# Altium PCB HS0038_BOARD.PcbDoc
Units mm, origin at the board's own origin, x right, y up, seen from the top; angles counter-clockwise.
Board outline 85 x 85 mm, 2 copper layers (Top Layer, Bottom Layer); 76 components, 56 nets, 278 pads, 68 vias.
Unrouted connection lines stored in the file: 4.
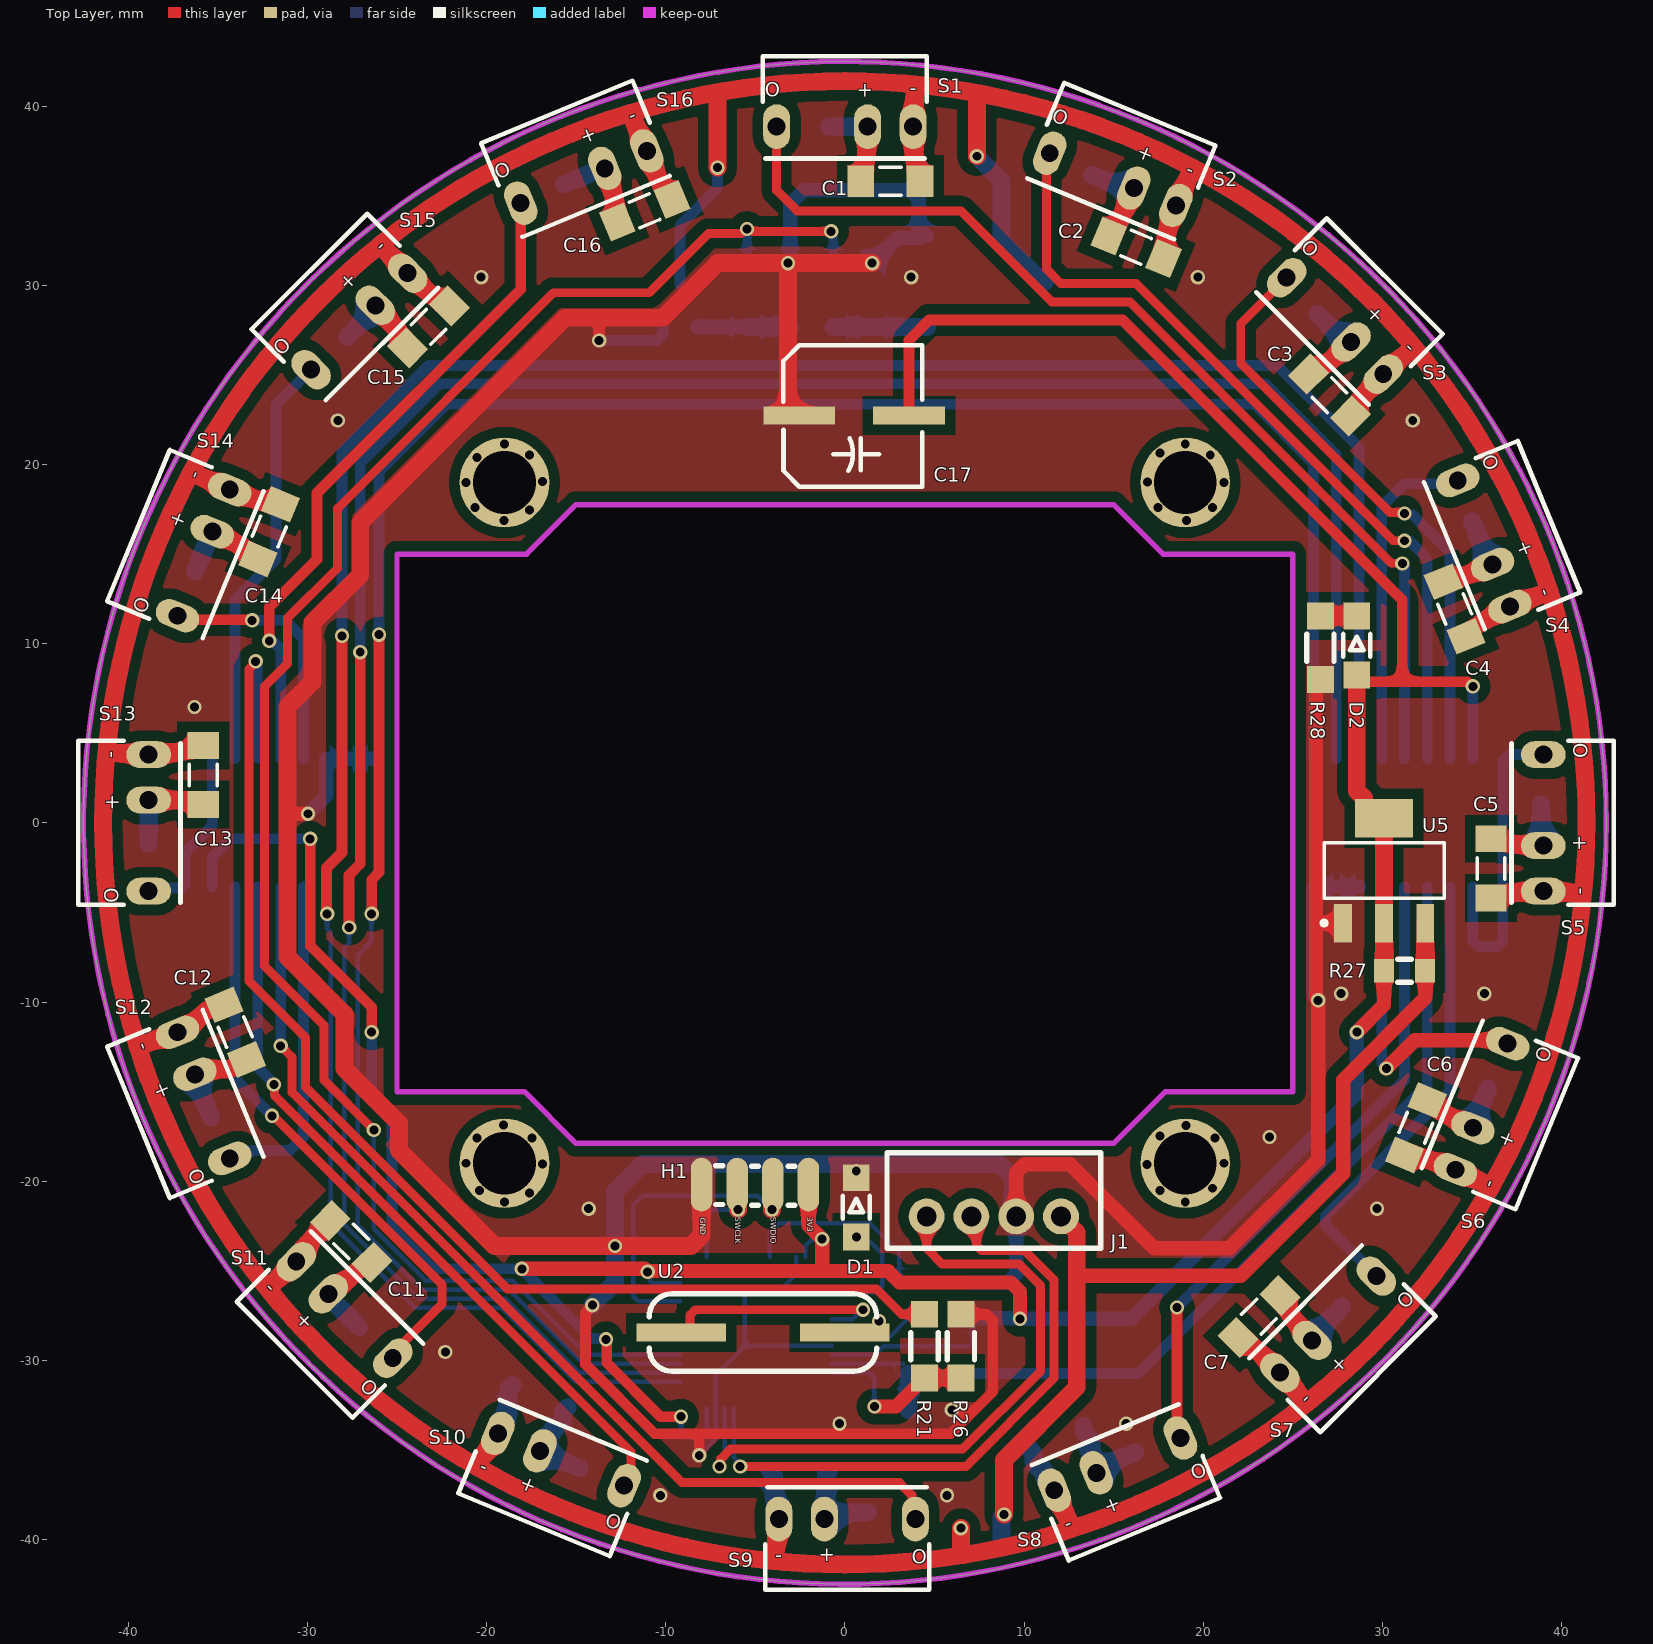
[diagram p0: Top Layer view]
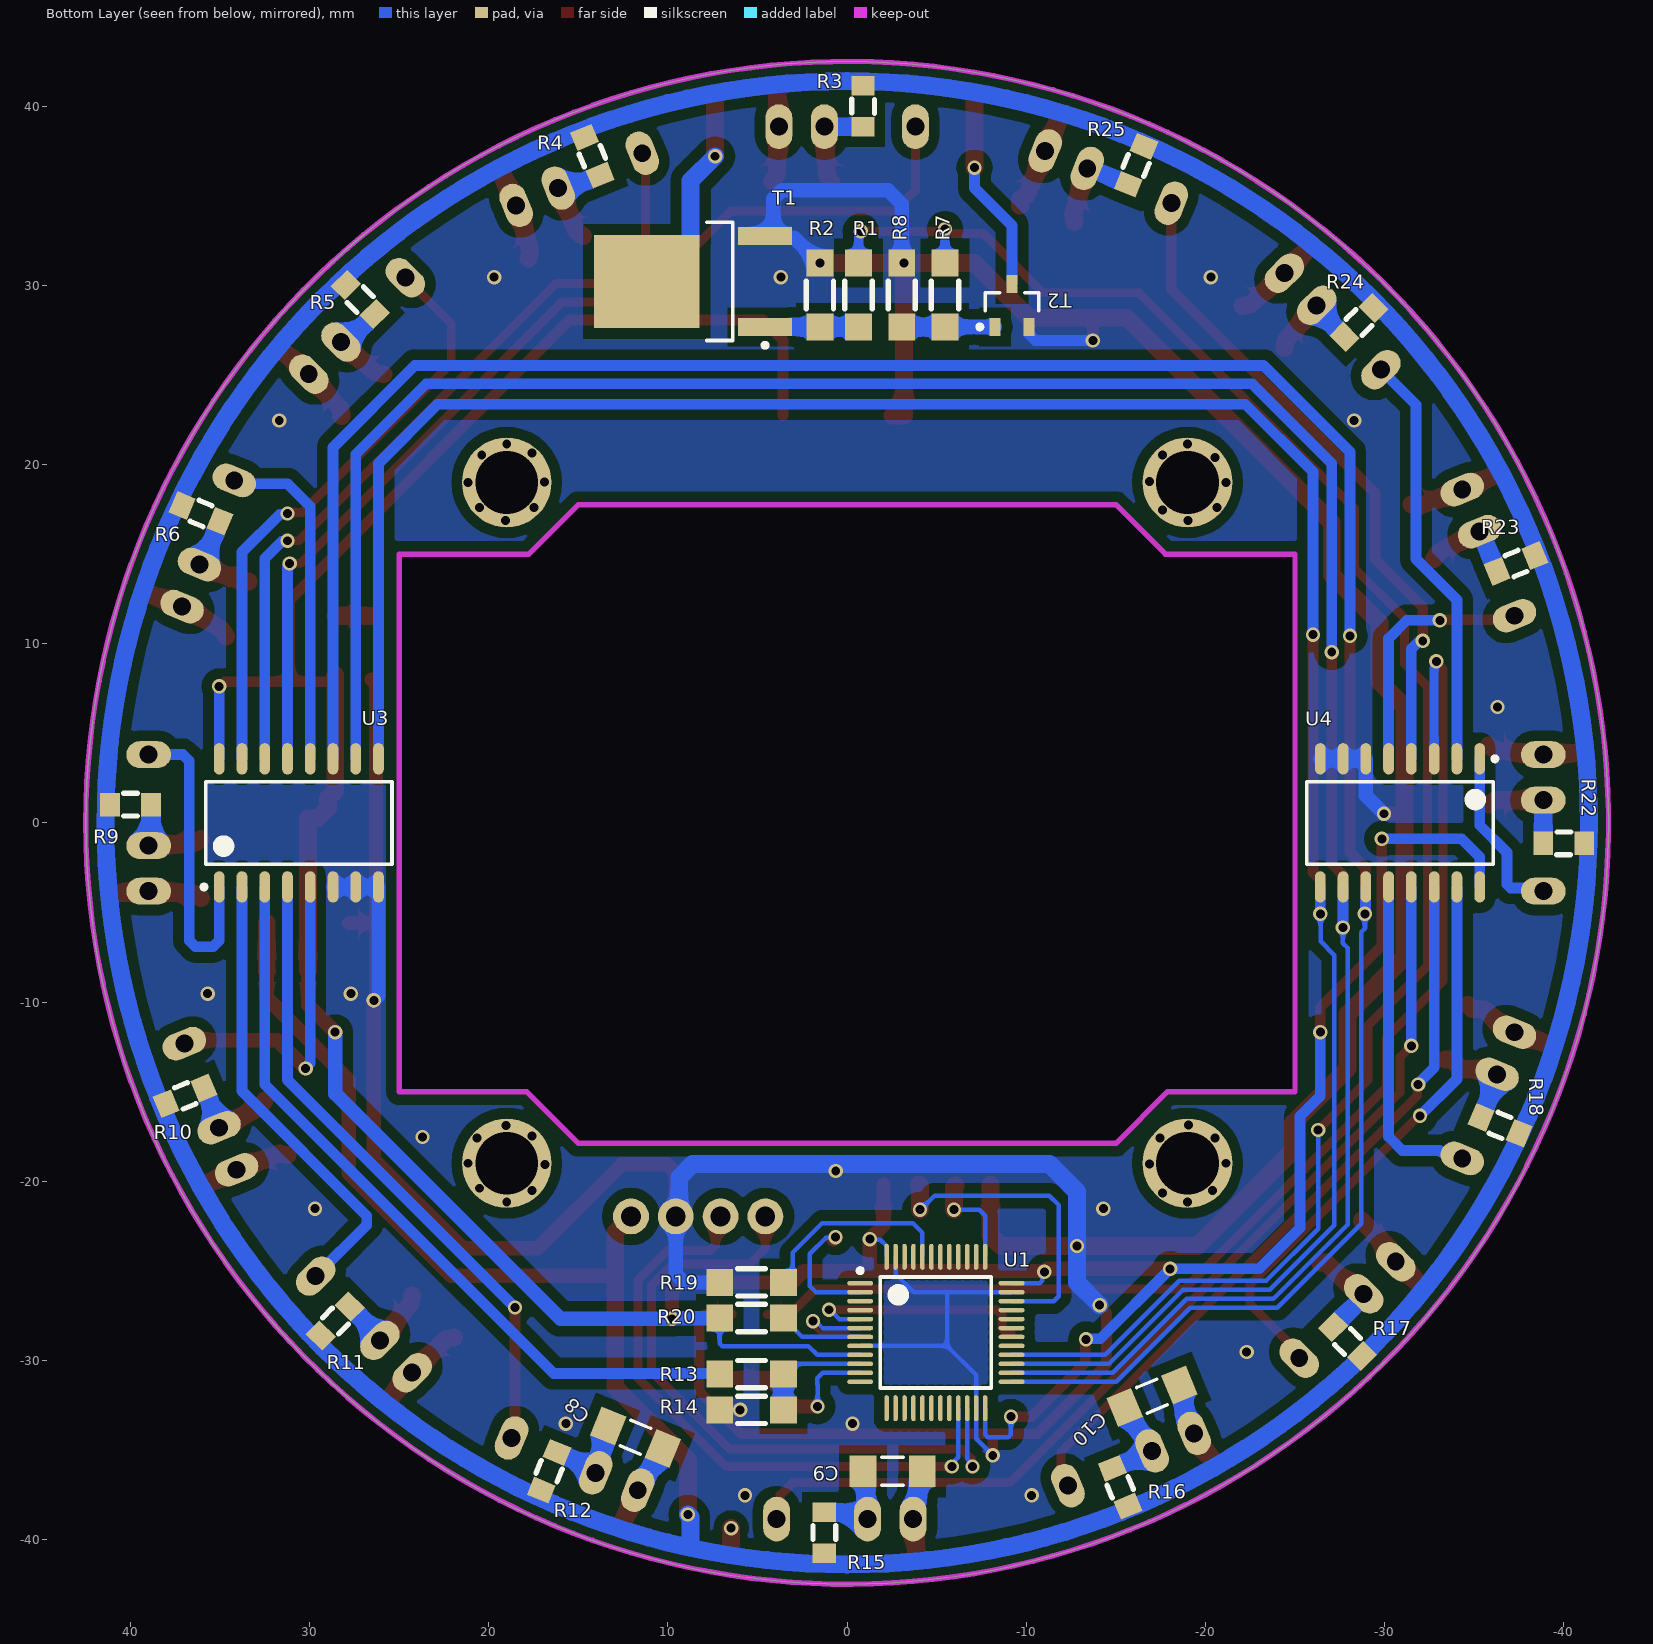
[diagram p1: Bottom Layer view, seen from below]
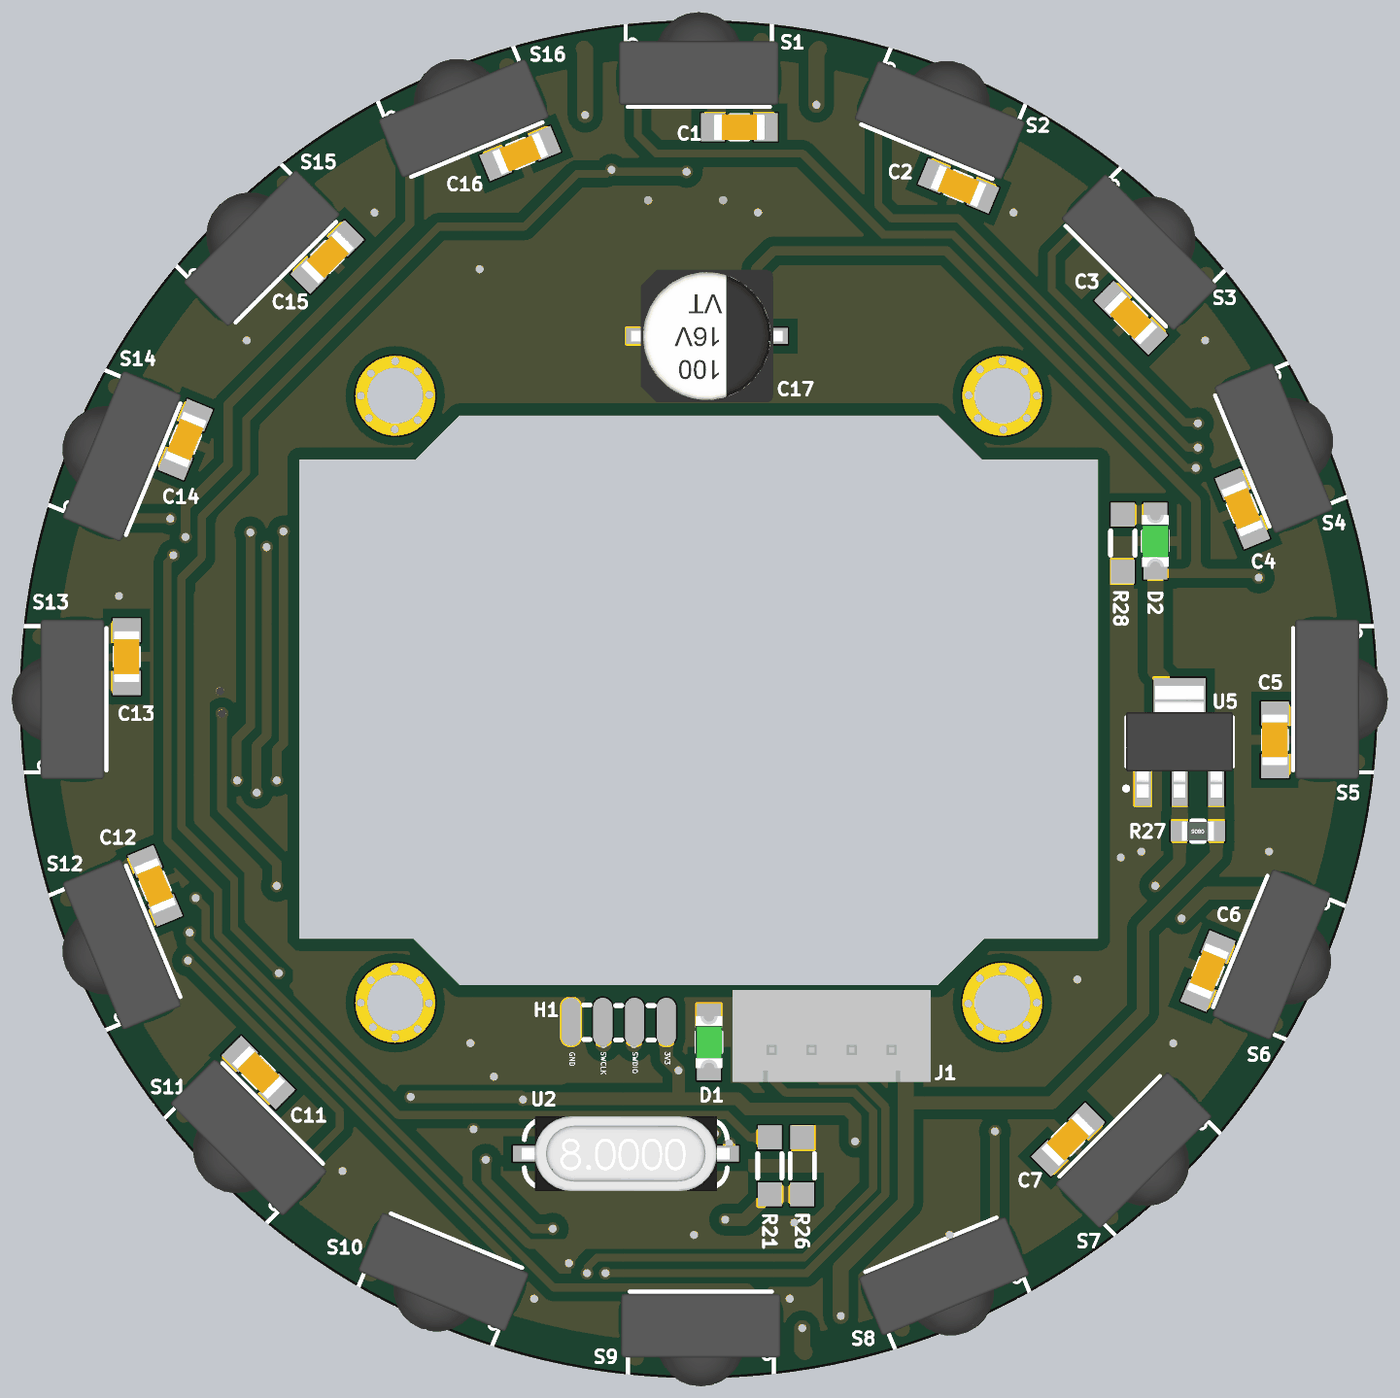
[diagram p2: 3D render of the assembled board from above, using the file's embedded part models]
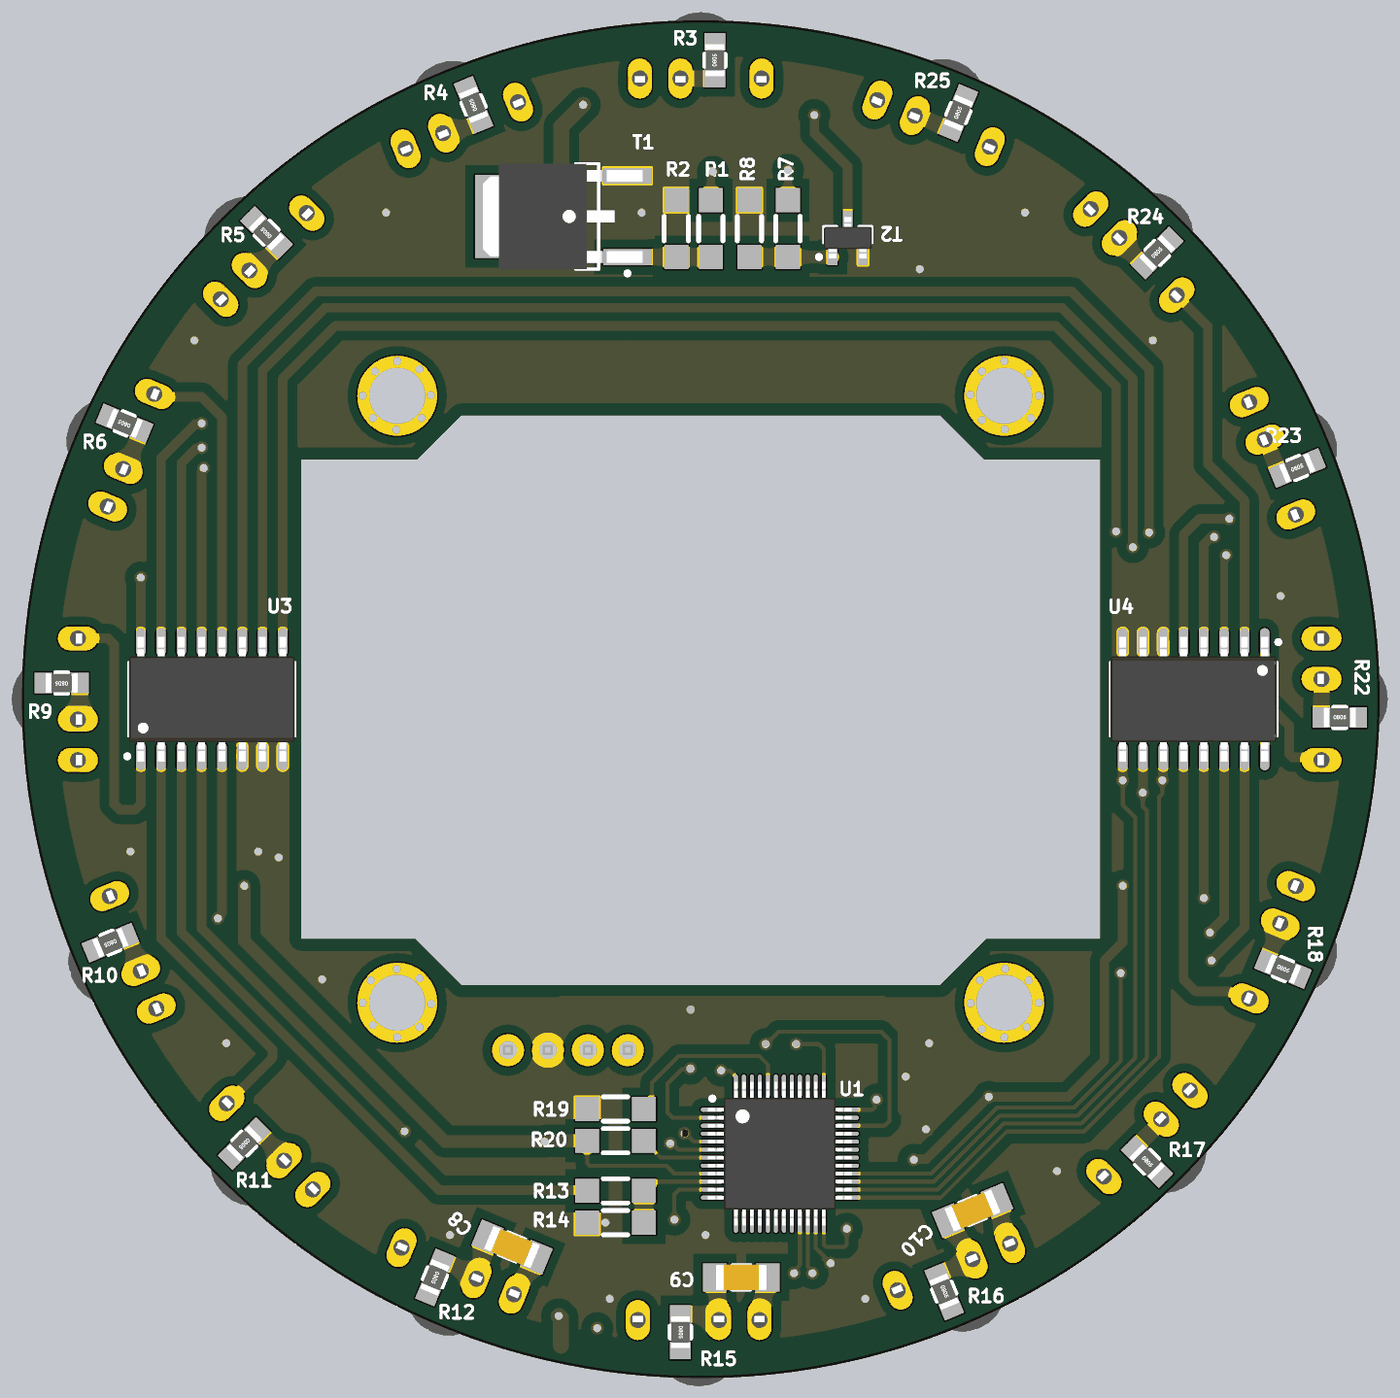
[diagram p3: 3D render of the assembled board from below, using the file's embedded part models]

## Layer stack, top to bottom
Top Solder: solder mask 0.0102, Solder Resist, Dk 3.5
Top Layer: signal copper 0.0356
Dielectric 1: dielectric 0.32, FR-4, Dk 4.8
Bottom Layer: signal copper 0.0356
Bottom Solder: solder mask 0.0102, Solder Resist, Dk 3.5

## Board outline
-42.5,0 ccw(c0,0) 0,-42.5 ccw(c0,0) 42.5,0 ccw(c0,0) 0,42.5 ccw(c0,0)
cut-out: -25,-15 -25,15 -17.766,15 -15,17.766 15,17.766 17.766,15 25,15 25,-15 17.893,-15 15,-17.893 -15,-17.893 -17.893,-15

## Design rules (kind name [scope] priority, off if disabled: settings)
Clearance [All] p1: gap=0.6 ignorepadtopadclearanceinfootprint=FALSE except(0: Arc-Hole Track-Hole SMDPad-Hole THPad-Hole Via-Hole Fill-Hole Poly-Hole Region-Hole Text-Hole; 0.25: Arc-Arc Arc-Track Arc-SMDPad Arc-Via Track-Track Track-SMDPad Track-Via SMDPad-SMDPad SMDPad-Via THPad-Via Via-Via; 0.254: Arc-THPad Arc-Text Track-THPad Track-Text SMDPad-THPad SMDPad-Text THPad-THPad THPad-Text Via-Text Fill-Text Poly-Text Region-Text Text-Text)
PlaneConnect [All] p1: planeconnectstyle=Direct reliefexpansion=0.508 reliefentries=4 reliefconductorwidth=0.254 reliefairgap=0.254
PolygonConnect [All] p1: connectstyle=Direct reliefconductorwidth=0.254 reliefentries=4 polygonreliefangle="90 Angle" airgapwidth=0.254
RoutingVias [All] p1: holewidth=0.5 width=0.8 viastyle="Through Hole" minholewidth=0.5 minwidth=0.8 maxholewidth=0.6 maxwidth=1
SolderMaskExpansion [All] p1: expansion=0.102 istentingtop=FALSE
Width [All] p1: maxlimit=10 minlimit=0.25 preferedwidth=0.3
29 further rules are at their usual default settings.

## Classes and differential pairs
component class HS0038_BOARD: C1 C2 C3 C4 C5 C6 C7 C8 C9 C10 C11 C12 C13 C14 C15 C16 C17 D1 D2 H1 J1 R1 R2 R3 R4 R5 R6 R7 R8 R9 R10 R11 R12 R13 R14 R15 R16 R17 R18 R19 R20 R21 R22 R23 R24 R25 R26 R27 R28 S1 S2 S3 S4 S5 S6 S7 S8 S9 S10 S11 S12 S13 S14 S15 S16 T1 T2 U1 U2 U3 U4 U5

## Components (designator, comment, footprint, x,y, rotation, side; value= is the part's Value field where it differs from the comment)
C1 "CAP" CAP1206 2.54,35.814 r0 top
C2 "CAP" CAP1206 16.257,32.134 r337.5 top
C3 "CAP" CAP1206 27.051,23.876 r315 top
C4 "CAP" CAP1206 34.036,11.938 r292.5 top
C5 "CAP" CAP1206 36.068,-2.54 r270 top
C6 "CAP" CAP1206 31.877,-17.018 r247.5 top
C7 "CAP" CAP1206 23.114,-27.559 r225 top
C8 "CAP" CAP1206 11.811,-34.29 r202.5 bottom
C9 "CAP" CAP1206 -2.54,-36.195 r180 bottom
C10 "CAP" CAP1206 -17.018,-32.004 r157.5 bottom
C11 "CAP" CAP1206 -27.559,-23.368 r135 top
C12 "CAP" CAP1206 -34.033,-11.683 r112.5 top
C13 "CAP" CAP1206 -35.814,2.667 r90 top
C14 "CAP" CAP1206 -32.131,16.256 r67.5 top
C15 "CAP" CAP1206 -23.241,27.686 r45 top
C16 "CAP" CAP1206 -11.177,34.166 r22.5 top
C17 "CAP" "CAP SMD 100uF 16V" 0.508,22.733 r0 top
D1 "LED" "LED GREEN 1206" 0.635,-21.463 r90 top
D2 "LED" "LED GREEN 1206" 28.575,9.906 r90 top
H1 "PROG" PROGRAMER -5.08,-20.193 r180 top
J1 "XH4" "XH 4PIN" 8.318,-21.082 r0 top
R1 "RES" RES1206 -0.635,29.464 r90 bottom
R2 "RES" RES1206 1.524,29.464 r90 bottom
R3 "RES" RES805 -0.889,40.005 r90 bottom
R4 "RES" RES805 14.224,37.211 r67.5 bottom
R5 "RES" RES805 27.178,29.21 r45 bottom
R6 "RES" RES805 36.068,17.272 r22.5 bottom
R7 "RES" RES1206 -5.461,29.464 r90 bottom
R8 "RES" RES1206 -3.048,29.464 r90 bottom
R9 "RES" RES805 40.005,1.016 r0 bottom
R10 "RES" RES805 36.957,-15.24 r337.5 bottom
R11 "RES" RES805 28.575,-27.813 r315 bottom
R12 "RES" RES805 16.637,-36.195 r292.5 bottom
R13 "RES" RES1206 5.334,-30.774 r0 bottom
R14 "RES" RES1206 5.334,-32.766 r180 bottom
R15 "RES" RES805 1.27,-39.624 r270 bottom
R16 "RES" RES805 -15.24,-37.084 r247.5 bottom
R17 "RES" RES805 -27.94,-28.956 r225 bottom
R18 "RES" RES805 -36.449,-16.891 r202.5 bottom
R19 "RES" RES1206 5.334,-25.654 r180 bottom
R20 "RES" RES1206 5.334,-27.644 r180 bottom
R21 "RES" RES1206 4.445,-29.21 r90 top
R22 "RES" RES805 -40.005,-1.143 r180 bottom
R23 "RES" RES805 -37.338,14.478 r157.5 bottom
R24 "RES" RES805 -28.575,27.94 r135 bottom
R25 "RES" RES805 -16.129,36.703 r112.5 bottom
R26 "RES" RES1206 6.477,-29.21 r270 top
R27 "RES" RES805 31.242,-8.255 r180 top
R28 "RES" RES1206 26.543,9.779 r270 top
S1 "TSOP1738" TSOP1738 0,38.608 r180 top
S2 "TSOP1738" TSOP1738 14.859,35.687 r157.5 top
S3 "TSOP1738" TSOP1738 27.178,27.559 r135 top
S4 "TSOP1738" TSOP1738 35.433,15.494 r112.5 top
S5 "TSOP1738" TSOP1738 38.735,0 r90 top
S6 "TSOP1738" TSOP1738 35.306,-15.748 r67.5 top
S7 "TSOP1738" TSOP1738 26.797,-27.813 r45 top
S8 "TSOP1738" TSOP1738 15.113,-35.56 r22.5 top
S9 "TSOP1738" TSOP1738 0.127,-38.608 r0 top
S10 "TSOP1738" TSOP1738 -15.748,-35.306 r337.5 top
S11 "TSOP1738" TSOP1738 -27.751,-27.007 r315 top
S12 "TSOP1738" TSOP1738 -35.56,-15.113 r292.5 top
S13 "TSOP1738" TSOP1738 -38.608,0 r270 top
S14 "TSOP1738" TSOP1738 -35.56,14.986 r247.5 top
S15 "TSOP1738" TSOP1738 -26.924,27.813 r225 top
S16 "TSOP1738" TSOP1738 -14.478,35.814 r202.5 top
T1 "FDD" FDD6690A 8.636,30.226 r0 bottom
T2 "AO3400A" AO3400A -9.205,28.886 r90 bottom
U1 "STM32F103C8T6" STM32F103C8T6 -4.953,-28.448 r180 bottom
U2 "Oscilator" "Crystal Oscilator" -4.572,-28.448 r0 top
U3 "MUX8" "4051 SMD" 30.607,0 r90 bottom
U4 "MUX8" "4051 SMD" -30.861,0 r270 bottom
U5 "1117" AMS1117 30.099,-2.667 r90 top
? "Comment" SCREW -19,-19 r90 top
? "Comment" SCREW 19,-19 r180 top
? "Comment" SCREW 19,19 r270 top
? "Comment" SCREW -19,19 r0 top

## Footprints (in the part's own frame and the unit in brackets; to place one, negate y for a bottom-side part, rotate by r counter-clockwise, add the part's x,y. Pads: shape width x height; smd on the part's side, far side on the other; paste and mask are expansions set on the pad)
"4051 SMD" [mm] "SOP, 16-Leads, Body 10.20x5.30mm, Pitch 1.27mm, IPC Medium Density"
  oval 1.75x0.6 smd: 1(-3.575,4.445) 2(-3.575,3.175) 3(-3.575,1.905) 4(-3.575,0.635) 5(-3.575,-0.635) 6(-3.575,-1.905) 7(-3.575,-3.175) 8(-3.575,-4.445) 9(3.575,-4.445) 10(3.575,-3.175) 11(3.575,-1.905) 12(3.575,-0.635) 13(3.575,0.635) 14(3.575,1.905) 15(3.575,3.175) 16(3.575,4.445)
  silkscreen extent -3.7,-5.2 2.3,5.42, body extent -3.9,-5.2 3.9,5.2, height 2
AMS1117 [mm] "SOT223, 4-Leads, Body 6.30x7.00mm (avg), Pitch 2.30mm, IPC Medium Density"
  rect 2.15x1 smd: 1(-2.925,2.3) 2(-2.925,0) 3(-2.925,-2.3)
  rect 2.15x3.25 smd: 4(2.925,0)
  silkscreen extent -3.05,-3.35 1.55,3.47, body extent -3.5,-3.35 3.5,3.35, height 1.65
AO3400A [mm] "SOT23, 3-Leads, Body 2.90x2.45mm, Pitch 0.95mm, IPC Medium Density"
  rect 1x0.6 smd: 1(-1.2,0.95) 2(-1.2,-0.95) 3(1.2,0)
  silkscreen extent -1.32,-1.5 0.7,1.93, body extent -1.3,-1.5 1.3,1.5, height 1.1
CAP1206 [mm] "Chip Capacitor, 2-Leads, Body 3.20x1.60mm, IPC Medium Density"
  rect 1.5x1.75 smd: 1(-1.651,0) 2(1.651,0)
  silkscreen extent -0.6,-0.77 0.6,0.77, body extent -1.6,-0.8 1.6,0.8, height 1
"CAP SMD 100uF 16V" [mm]
  rect 4x1 smd: 1(-3.048,0) 2(3.07,0.003)
  silkscreen extent -3.94,-3.97 3.81,3.94, body extent -4.75,-4.15 4.75,4.15, height 10.51
"Crystal Oscilator" [mm]
  rect 5x1 smd: 1(-4.572,0) 2(4.572,0)
  silkscreen extent -6.35,-2.16 6.35,2.16, body extent -6.5,-2.35 6.5,2.35, height 4.21
FDD6690A [mm] "D-PAK, 3-Pads, Body 5.85x6.66mm (max), IPC Medium Density"
  rect 3x1 smd: 1(-4.05,2.54) 3(-4.05,-2.54)
  rect 5.9x5.2 smd: 4(2.55,0)
  silkscreen extent -4.17,-3.3 -0.8,3.69, body extent -5,-3.3 5,3.3, height 3.03
"LED GREEN 1206" [mm]
  rect 1.5x1.5 smd: 1(-1.651,0) 2(1.651,0)
  silkscreen extent -0.64,-0.76 0.64,0.76, body extent -1.63,-0.83 1.64,0.82, height 0.9
PROGRAMER [mm]
  oval 1.2x3 smd: 1(-3.048,0) 2(-1.058,0) 3(0.931,0) 4(2.921,0)
  silkscreen extent -2.29,-1.05 2.12,1.14
RES805 [mm]
  rect 1.1x1.3 smd: 1(-1.143,0) 2(1.143,0)
  silkscreen extent -0.39,-0.64 0.38,0.64, body extent -1,-0.6 1,0.6, height 0.48
RES1206 [mm]
  rect 1.5x1.5 smd: 1(-1.778,0) 2(1.778,0)
  silkscreen extent -0.76,-0.76 0.76,0.76, body extent -1.58,-0.82 1.58,0.82, height 0.53
SCREW [mm]
  round 5 hole 3.5: 1(0,0)
  round 0 hole 0.5: ""(-2.159,0) ""(-1.651,-1.397) ""(-1.524,1.397) ""(-0.031,-2.11) ""(0,2.159) ""(1.397,1.524) ""(1.397,-1.524) ""(2.128,0.059)
STM32F103C8T6 [mm] "TSQFP, 48-Leads, Body 7.00x7.00mm, Pitch 0.50mm, IPC Medium Density"
  oval 1.45x0.25 smd: 1(-4.225,2.75) 2(-4.225,2.25) 3(-4.225,1.75) 4(-4.225,1.25) 5(-4.225,0.75) 6(-4.225,0.25) 7(-4.225,-0.25) 8(-4.225,-0.75) 9(-4.225,-1.25) 10(-4.225,-1.75) 11(-4.225,-2.25) 12(-4.225,-2.75) 25(4.225,-2.75) 26(4.225,-2.25) 27(4.225,-1.75) 28(4.225,-1.25) 29(4.225,-0.75) 30(4.225,-0.25) 31(4.225,0.25) 32(4.225,0.75) 33(4.225,1.25) 34(4.225,1.75) 35(4.225,2.25) 36(4.225,2.752)
  oval 0.25x1.45 smd: 13(-2.75,-4.225) 14(-2.25,-4.225) 15(-1.75,-4.225) 16(-1.25,-4.225) 17(-0.75,-4.225) 18(-0.25,-4.225) 19(0.25,-4.225) 20(0.75,-4.225) 21(1.25,-4.225) 22(1.75,-4.225) 23(2.25,-4.225) 24(2.75,-4.225) 37(2.75,4.225) 38(2.25,4.225) 39(1.75,4.225) 40(1.25,4.225) 41(0.75,4.225) 42(0.25,4.225) 43(-0.25,4.225) 44(-0.75,4.225) 45(-1.25,4.225) 46(-1.75,4.225) 47(-2.25,4.225) 48(-2.75,4.225)
  silkscreen extent -4.35,-3.1 3.1,3.57, body extent -4.5,-4.5 4.5,4.5, height 1.6
TSOP1738 [mm]
  oval 1.5x2.5 hole 1: 1(-3.81,-0.254) 2(-1.27,-0.254) 3(3.81,-0.254)
  silkscreen extent -4.57,-4.19 4.57,1.52, body extent -5,-4.4 5,1.4, height 13.5
"XH 4PIN" [mm]
  round 2 hole 1.1: 1(-3.753,-0.889) 2(-1.253,-0.889) 3(1.247,-0.889) 4(3.747,-0.889)
  silkscreen extent -5.97,-2.67 5.97,2.67, body extent -6.2,-2.88 6.2,2.88, height 7

## Part data
C1 C2 C3 C4 C5 C6 C7 C8 C9 C10 C11 C12 C13 C14 C15 C16: library part CAP1206, "Capacitor SMD 1206"
C17: library part "CAP Electrolit SMD", "Capacitor Electrolit SMD"
D1 D2: library part "LED SMD 1206", "LED SMD 1206"
H1: library part Programmer
J1: library part "XH 4PIN", "XH Connector 4pins"
R1 R2 R7 R8 R13 R14 R19 R20 R21 R26 R28: library part RES1206, "RESISTOR SMD"
R3 R4 R5 R6 R9 R10 R11 R12 R15 R16 R17 R18 R22 R23 R24 R25 R27: library part RES805, "RESISTOR SMD"
S1 S2 S3 S4 S5 S6 S7 S8 S9 S10 S11 S12 S13 S14 S15 S16: "IR SENSOR"
T1: library part FDD6690A, "FDD6690A MOSFET N-Chanel"
U1: "STM32F103C8T6 / LQFP48"
U2: library part Crystal, "Crystal Oscilator 8MHz"
U3 U4: library part 4051, "MULTIPLEXER 8 BIT"
U5: library part AMS1117, "3.3v Regulator"

## Via types
v1: diameter 0.8, hole 0.5, Top Layer to Bottom Layer, tented both sides, 68 vias

## Nets (pads, with @x,y where several pads share a name; then routed paths per layer and width w, separated by ;. In a path a pad name is that pad's centre, name@x,y a point inside that pad or via, vN(x,y) a via of type N, cw(c..) or ccw(c..) an arc to the next point about the centre after c; other vN are vias at no path point)
+5: J1.4 R3.2 R4.2 R5.2 R6.2 R9.2 R10.2 R11.2 R12.2 R15.2 R16.2 R17.2 R18.2 R22.2 R23.2 R24.2 R25.2 R27.1 U5.3 | length 314.8
  Top Layer w0.8: J1.4 12.256,-22.162 12.945,-22.851 ; 12.945,-25.273 22.098,-25.273 27.813,-19.558 27.813,-14.351 32.399,-9.765 R27.1@32.399,-8.241
  Top Layer w1: v1(8.89,-38.608) 8.89,-35.56 12.945,-31.505 12.945,-25.273 12.945,-22.851 J1.4@12.256,-22.162 ; R27.1 32.399,-8.241 U5.3
  Bottom Layer w1: 8.752,-40.464 8.752,-38.746 v1(8.89,-38.608) ; 41.4,0 ccw(c0,0) 41.4,0
A: U1.27 U3.9 U4.9 | length 136.9
  Top Layer w0.6: v1(-26.416,-5.08) -26.416,-3.175 -26,-2.759 v1(-26,10.506)
  Bottom Layer w0.25: v1(-26.416,-5.08) -26.429,-5.093 -26.429,-6.617 -27.194,-7.382 -27.194,-22.463 -23.59,-26.067 -18.747,-26.067 -14.616,-30.198 U1.27
  Bottom Layer w0.6: v1(-26.416,-5.08) U4.9 ; v1(-26,10.506) -26,19.593 -22.225,23.368 22.86,23.368 26.162,20.066 U3.9
ADC0: R13.1 R14.2 U1.10 | length 6
  Bottom Layer w0.25: U1.10 R13.1@3.261,-30.198
  Bottom Layer w1: R14.2 R13.1
ADC1: R21.1 R26.2 U1.11 | length 9.6
  Top Layer w0.8: v1(1.651,-32.578) 2.855,-32.578 R21.1 R26.2
  Bottom Layer w0.25: U1.11 1.361,-30.698 1.662,-30.999 1.662,-31.358 1.651,-31.369 v1(1.651,-32.578)
B: U1.26 U3.10 U4.10 | length 142.3
  Top Layer w0.6: v1(-27.673,-5.842) -27.686,-5.829 -27.686,-2.921 -27.051,-2.286 v1(-27.051,9.525)
  Bottom Layer w0.25: v1(-27.673,-5.842) -27.673,-6.718 -27.94,-6.985 -27.94,-22.424 -23.797,-26.567 -18.954,-26.567 -14.823,-30.698 U1.26
  Bottom Layer w0.6: U4.10 -27.686,-5.829 v1(-27.673,-5.842) ; v1(-27.051,9.525) -27.051,20.066 -22.606,24.511 23.495,24.511 27.432,20.574 U3.10
BOOT0: R19.2 U1.44 | length 11.4
  Bottom Layer w0.25: U1.44 -4.203,-22.872 -3.67,-22.339 1.384,-22.339 3.048,-24.003 3.048,-25.146 R19.2
C: U1.25 U3.11 U4.11 | length 146.3
  Top Layer w0.6: v1(-28.895,-5.08) -28.933,-5.042 -28.933,-2.517 -28.07,-1.654 v1(-28.07,10.44)
  Bottom Layer w0.25: v1(-28.895,-5.08) -28.895,-5.903 -28.702,-6.096 -28.702,-22.369 -24.004,-27.067 -19.161,-27.067 -15.03,-31.198 U1.25
  Bottom Layer w0.6: U4.11 -28.956,-4.369 -28.933,-4.392 -28.933,-5.042 v1(-28.895,-5.08) ; v1(-28.07,10.44) -28.07,20.698 -23.241,25.527 24.13,25.527 28.702,20.955 U3.11
GND: C17.1 D1.2 H1.4 J1.3 R2.2 R8.2 R14.1 R19.1 R26.1 R28.2 T1.3 T2.2 U1.8 U1.23 U1.35 U1.47 U3.6 U3.7 U3.8 U4.6 U4.7 U4.8 U5.1 | length 294.6
  Top Layer w0.6: v1(-14.097,-26.924) -14.097,-26.978 -14.478,-27.359 -14.478,-30.226 -10.607,-34.097 -8.408,-34.097 ; v1(-13.716,26.924) -13.716,28.194 ; v1(-8.128,-35.306) -8.128,-34.163 -8.342,-34.163 -8.408,-34.097 ; v1(5.969,-32.766) 6.096,-32.766 6.667,-33.337 ; R26.1 7.904,-27.432 8.255,-27.783 8.255,-31.75 6.667,-33.337 ; -8.408,-34.097 5.908,-34.097 6.667,-33.337
  Top Layer w0.8: -31.115,0.508 v1(-29.972,0.508) ; J1.3 9.565,-19.519 10.034,-19.05 12.573,-19.05 17.272,-23.749 21.463,-23.749 26.416,-18.796 v1(26.416,-9.906) 26.299,-9.789 26.299,-5.715 ; R28.2 26.299,7.757 26.299,-5.715 ; U5.1 26.422,-5.592 26.299,-5.715
  Top Layer w1: H1.4 -8.001,-23.036 -8.587,-23.622 v1(-12.827,-23.622) -19.558,-23.622 -24.892,-18.288 -24.892,-16.764 -27.94,-13.716 -27.94,-10.668 -31.115,-7.493 -31.115,0.508 -31.115,6.477 -29.718,7.874 -29.718,11.176 -27.051,13.843 -27.051,16.764 -15.621,28.194 -13.716,28.194 -10.16,28.194 -7.112,31.242 v1(-3.175,31.242) ; C17.1 -3.175,22.733 v1(-3.175,31.242) ; v1(1.524,31.242) v1(-3.175,31.242)
  Bottom Layer w0.25: U1.35 -5.461,-26.198 ; v1(-8.128,-35.306) -7.203,-34.381 -7.203,-30.825 -5.576,-29.198 ; U1.47 -2.703,-25.182 -3.719,-26.198 -5.461,-26.198 ; U1.8 -5.576,-29.198 ; -5.576,-29.198 -5.576,-26.313 -5.461,-26.198
  Bottom Layer w0.6: v1(-13.716,26.924) -10.506,26.924 -10.155,27.275 T2.2 ; v1(5.969,-32.766) R14.1
  Bottom Layer w0.8: v1(-29.972,0.508) -28.956,1.524 U4.6 U4.7 U4.8 ; R8.2 -3.048,34.544 -2.286,35.306 3.649,35.306 4.117,34.837 4.117,32.866 4.217,32.766 T1.3 ; v1(1.524,31.242) 2.948,32.666 T1.3@4.117,32.666 ; R19.1 9.096,-25.654 9.565,-25.185 J1.3 ; v1(26.416,-9.906) 26.162,-9.652 U3.8 U3.7 U3.6
  Bottom Layer w1: v1(-14.097,-26.924) -12.827,-25.654 -12.827,-20.574 -11.303,-19.05 0.635,-19.05 8.636,-19.05 9.374,-19.788 9.374,-21.78 J1.3
  other v1: -10.3,-37.537 5.7,-37.537 -0.3,-33.537 15.7,-33.537 -22.3,-29.537 -14.3,-21.537 29.7,-21.537 0.635,-19.431 23.7,-17.537 27.7,-9.537 35.7,-9.537 -36.3,6.463 -28.3,22.463 31.7,22.463 -20.3,30.463 3.7,30.463 19.7,30.463
NetC1_1: C1.1 R3.1 S1.2 | length 5.3
  Top Layer w1: C1.1 1.139,36.189 1.27,38.362 S1.2
  Bottom Layer w1: R3.1 S1.2
NetC2_1: C2.1 R4.1 S2.2 | length 5.7
  Top Layer w1: C2.1 15.106,33.017 15.938,34.974 S2.2
  Bottom Layer w1: R4.1 13.931,36.111 16.046,35.234 S2.2
NetC3_1: C3.1 R5.1 S3.2 | length 5.7
  Top Layer w1: C3.1 26.326,25.132 27.902,26.487 S3.2
  Bottom Layer w1: R5.1 26.486,28.306 28.103,26.688 S3.2
NetC4_1: C4.1 R6.1 S4.2 | length 5.7
  Top Layer w1: C4.1 33.816,13.449 35.692,14.227 S4.2
  Bottom Layer w1: R6.1 35.076,16.699 36.04,14.371 S4.2
NetC5_1: C5.1 R9.1 S5.2 | length 5.4
  Top Layer w1: C5.1 36.443,-1.139 38.489,-1.27 S5.2
  Bottom Layer w1: R9.1 38.87,0.866 38.87,-1.27 S5.2
NetC6_1: C6.1 R10.1 S6.2 | length 5.5
  Top Layer w1: C6.1 32.76,-15.867 34.593,-16.827 S6.2
  Bottom Layer w1: S6.2 34.997,-16.995 35.847,-14.943 R10.1
NetC7_1: C7.1 R11.1 S7.2 | length 5.8
  Top Layer w1: C7.1 24.37,-26.834 25.725,-28.537 S7.2
  Bottom Layer w1: S7.2 25.986,-28.798 27.667,-27.117 R11.1
NetC8_1: C8.1 R12.1 S8.2 | length 6.1
  Top Layer w1: S8.2@13.846,-35.819 S8.2
  Bottom Layer w1: C8.1 13.336,-34.007 13.75,-34.421 13.75,-35.994 S8.2 13.955,-36.084 16.066,-35.209 R12.1
NetC9_1: C9.1 R15.1 S9.2 | length 5.6
  Top Layer w1: S9.2 S9.2@-1.143,-38.362
  Bottom Layer w1: S9.2 -1.047,-38.766 S9.2@-1.047,-38.505 ; C9.1 -1.047,-36.353 S9.2@-1.047,-38.505 ; R15.1 1.12,-38.505 S9.2@-1.047,-38.505
NetC10_1: C10.1 R16.1 S10.2 | length 5.9
  Top Layer w1: S10.2 S10.2@-17.019,-34.649
  Bottom Layer w1: C10.1 -15.739,-32.882 -15.739,-33.37 -17.019,-34.649 S10.2 -17.037,-35.099 -14.94,-35.968 R16.1
NetC11_1: C11.1 R17.1 S11.2 | length 5.8
  Top Layer w1: S11.2 -28.38,-25.84 -28.049,-25.84 -26.745,-24.535 C11.1
  Bottom Layer w1: S11.2 -28.905,-26.365 -27.233,-28.037 R17.1
NetC12_1: C12.1 R18.1 S12.2 | length 5.9
  Top Layer w1: S12.2 -35.994,-13.75 -34.292,-13.75 -33.75,-13.208 C12.1
  Bottom Layer w1: S12.2 -36.372,-14.075 -35.445,-16.313 R18.1
NetC13_1: C13.1 R22.1 S13.2 | length 5.5
  Top Layer w1: S13.2 -38.362,1.27 -36.189,1.266 C13.1
  Bottom Layer w1: R22.1 S13.2
NetC14_1: C14.1 R23.1 S14.2 | length 5.5
  Top Layer w1: S14.2 -34.847,16.065 -33.014,15.105 C14.1
  Bottom Layer w1: R23.1 -36.222,14.178 -35.353,16.275 S14.2
NetC15_1: C15.1 R24.1 S15.2 | length 5.5
  Top Layer w1: S15.2 -25.852,28.537 -24.497,26.961 C15.1
  Bottom Layer w1: R24.1 -27.667,27.244 -26.113,28.798 S15.2
NetC16_1: C16.1 R25.1 S16.2 | length 5.6
  Top Layer w1: S16.2 -13.211,36.073 -12.615,33.977 C16.1
  Bottom Layer w1: R25.1 -15.552,35.701 -13.422,36.583 S16.2
NetD1_1: D1.1 U1.2 | length 6.8
  Top Layer w0.8: v1(0.648,-23.127) D1.1@0.773,-23.252
  Bottom Layer w0.25: U1.2 1.742,-26.198 2.084,-25.856 2.084,-24.055 1.2,-23.171 0.692,-23.171 v1(0.648,-23.127)
NetD2_2: D2.2 R28.1 | length 2
  Top Layer w1: R28.1 D2.2
NetR1_1: R1.1 R2.1 T1.1 | length 5.2
  Bottom Layer w1: R1.1 R2.1 T1.1
NetR7_1: R7.1 R8.1 T2.1 | length 5.2
  Bottom Layer w0.8: T2.1 R7.1
  Bottom Layer w1: R7.1 R8.1
NetR13_2: R13.2 U3.3 | length 43.3
  Bottom Layer w0.6: R13.2@6.889,-30.734 16.383,-30.734 32.512,-14.605 U3.3
NetR21_2: R21.2 U4.3 | length 70.5
  Top Layer w0.5: v1(-32.893,9.017) -32.893,8.955 -33.274,8.574 -33.274,-8.825 -30.099,-12 -30.099,-14.749 -18.824,-26.024 1.767,-26.024 3.175,-27.432 R21.2
  Bottom Layer w0.5: v1(-32.893,9.017) -32.836,8.96 -32.836,8.747 -32.766,8.678 U4.3
NetU1_5: U1.5 U2.1 | length 13.1
  Top Layer w0.5: U2.1 -8.886,-28.448 -8.636,-28.198 -8.636,-27.471 -8.343,-27.178 v1(1.016,-27.178)
  Bottom Layer w0.25: U1.5 0.44,-27.698 0.96,-27.178 v1(1.016,-27.178)
NetU1_6: U1.6 U2.2 | length 5.1
  Top Layer w0.25: U2.2 1.53,-28.448 1.905,-28.073 v1(1.905,-27.813)
  Bottom Layer w0.25: U1.6 1.371,-28.198 1.756,-27.813 v1(1.905,-27.813)
NRST: R20.2 U1.7 | length 4.7
  Bottom Layer w0.25: U1.7 2.502,-28.698 R20.2
S0: S1.3 U3.13 | length 58.1
  Top Layer w0.5: S1.3 -3.81,35.306 -2.667,34.163 6.477,34.163 11.557,29.083 15.913,29.083 30.503,14.493 31.1,14.493 v1(31.115,14.478)
  Bottom Layer w0.6: v1(31.115,14.478) 31.115,14.424 31.242,14.297 U3.13
S1: S2.3 U3.14 | length 45.7
  Top Layer w0.5: S2.3 11.245,37.188 11.245,30.919 12.065,30.099 16.256,30.099 30.607,15.748 v1(31.242,15.748)
  Bottom Layer w0.6: v1(31.242,15.748) 31.28,15.71 31.558,15.71 32.088,15.18 32.512,14.755 U3.14
S2: S3.3 U3.15 | length 33.4
  Top Layer w0.5: S3.3 22.098,27.867 22.098,25.654 30.423,17.329 31.185,17.329 v1(31.242,17.272)
  Bottom Layer w0.6: v1(31.242,17.272) 31.28,17.234 31.661,17.234 33.782,15.113 U3.15
S3: S4.3 U3.12 | length 18.9
  Bottom Layer w0.6: U3.12 29.972,17.653 31.242,18.923 34.021,18.923 S4.3
S4: S5.3 U3.1 | length 17.4
  Bottom Layer w0.6: U3.1 35.052,-6.565 35.403,-6.916 36.378,-6.916 36.729,-6.565 36.729,3.459 37.081,3.81 S5.3
S5: S6.3 U3.5 | length 17.8
  Top Layer w0.8: v1(30.226,-13.716) 31.808,-12.134 36.807,-12.134 S6.3
  Bottom Layer w0.6: U3.5 29.972,-13.408 30.226,-13.662 v1(30.226,-13.716)
S6: S7.3 U3.2 | length 25.8
  Bottom Layer w0.6: S7.3 26.813,-22.441 26.813,-21.944 33.782,-14.974 U3.2
S7: S8.3 U3.4 | length 36.1
  Top Layer w0.6: v1(18.542,-27.051) 18.54,-27.053 18.54,-34.147 S8.3
  Bottom Layer w0.6: v1(18.542,-27.051) 31.242,-14.351 U3.4
S8: S9.3 U4.13 | length 57.1
  Top Layer w0.5: v1(-31.496,-12.446) -30.861,-13.081 -30.861,-15.048 -9.079,-36.83 3.048,-36.83 3.746,-37.528 3.746,-38.671 S9.3
  Bottom Layer w0.6: v1(-31.496,-12.446) U4.13
S9: S10.3 U4.14 | length 42.2
  Top Layer w0.5: v1(-31.877,-14.605) -31.85,-14.632 -31.85,-15.205 -31.289,-15.766 -11.938,-35.117 -11.938,-35.744 -11.943,-35.748 -11.943,-36.616 S10.3
  Bottom Layer w0.6: U4.14 -32.766,-13.662 -31.877,-14.551 v1(-31.877,-14.605)
S10: S11.3 U4.15 | length 32.3
  Top Layer w0.5: v1(-31.977,-16.356) -31.906,-16.356 -22.479,-25.783 -22.479,-26.853 -25.237,-29.611 S11.3
  Bottom Layer w0.6: U4.15 -34.036,-14.297 v1(-31.977,-16.356)
S11: S12.3 U4.12 | length 18.6
  Bottom Layer w0.6: S12.3 -33.973,-18.367 -33.152,-18.367 -33.073,-18.288 -30.988,-18.288 -30.226,-17.526 U4.12
S12: S13.3 U4.1 | length 9.8
  Bottom Layer w0.6: S13.3 -38.69,-3.638 -37.039,-3.638 -36.83,-3.429 -36.83,-1.651 -35.306,-0.127 U4.1
S13: S14.3 U4.5 | length 14.3
  Top Layer w0.6: S14.3 -37.027,11.337 -33.12,11.337 v1(-33.086,11.303)
  Bottom Layer w0.6: v1(-33.086,11.303) -31.242,11.303 -30.226,10.287 U4.5
S14: S15.3 U4.2 | length 23.5
  Bottom Layer w0.6: U4.2 -34.036,12.446 -31.75,14.732 -31.75,23.346 S15.3
S15: S16.3 U4.4 | length 37.2
  Top Layer w0.6: v1(-32.131,10.16) -32.131,12.053 -29.464,14.72 -29.464,18.415 -18.095,29.784 -18.095,33.694 -18.076,33.713 -18.076,34.572 S16.3
  Bottom Layer w0.6: v1(-32.131,10.16) -32.093,10.122 -31.909,10.122 -31.496,9.709 U4.4
S_GND: C1.2 C2.2 C3.2 C4.2 C5.2 C6.2 C7.2 C8.2 C9.2 C10.2 C11.2 C12.2 C13.2 C14.2 C15.2 C16.2 S1.1 S2.1 S3.1 S4.1 S5.1 S6.1 S7.1 S8.1 S9.1 S10.1 S11.1 S12.1 S13.1 S14.1 S15.1 S16.1 T1.4 T2.3 | length 373
  Top Layer w1: -41.213,3.931 -39.362,3.81 S13.1 -38.362,3.81 -36.189,4.068 C13.2 ; -39.474,-12.479 -37.715,-11.882 S12.1 -36.847,-11.69 -35.561,-10.404 -34.911,-10.404 C12.2 ; -36.48,19.575 -34.799,18.795 S14.1 -33.875,18.412 -31.941,17.694 C14.2 ; -32.216,-26.001 -30.708,-24.493 S11.1 -30.176,-24.044 -30.176,-23.65 C11.2 ; -25.924,32.278 -24.763,31.04 S15.1 -24.056,30.333 -22.516,28.942 C15.2 ; -20.526,-35.953 -20.526,-35.65 -19.365,-34.489 S10.1 S10.1@-19.365,-33.677 ; -11.978,39.629 -11.247,37.969 S16.1 -10.864,37.045 -10.026,35.049 C16.2 C16.2@-9.652,34.449 ; -7.198,40.726 -7.112,40.64 v1(-7.112,36.576) ; -3.943,-41.212 -3.683,-39.362 S9.1 S9.1@-3.683,-38.362 ; 3.919,41.214 3.81,39.362 S1.1 3.81,38.362 3.941,36.189 C1.2 ; v1(6.477,-39.37) 6.477,-40.724 6.62,-40.867 ; v1(7.366,37.211) 7.366,40.546 7.529,40.71 ; S8.1@11.499,-36.791 S8.1 11.882,-37.715 12.71,-39.401 ; C2.2 17.695,31.945 18.285,34.002 S2.1 18.668,34.926 19.423,36.561 ; C7.2 22.389,-28.815 23.929,-30.333 S7.1 24.636,-31.04 25.769,-32.403 ; C3.2 28.307,23.151 29.698,24.691 S3.1 30.405,25.398 31.752,26.566 ; C6.2 31.687,-18.456 33.621,-19.174 S6.1 34.545,-19.557 36.07,-20.321 ; C4.2 34.919,10.787 36.664,11.88 S4.1 37.588,12.263 39.326,12.94 ; C5.2 36.443,-3.941 38.489,-3.81 S5.1 39.489,-3.81 41.213,-3.931 ; 41.4,0 ccw(c0,0) 41.4,0
  Bottom Layer w0.6: T2.3 -9.205,33.34 -7.112,35.433 v1(-7.112,36.576)
  Bottom Layer w1: S10.1 -19.365,-33.677 -18.79,-33.102 -18.79,-31.619 C10.2 ; C9.2 -3.941,-36.445 -3.941,-37.969 -3.683,-38.227 S9.1 ; v1(7.366,37.211) 8.736,35.841 8.736,32.326 8.89,32.326 10.99,30.226 T1.4 ; C8.2 10.532,-35.168 10.532,-35.689 11.69,-36.847 S8.1
SCL: J1.2 U1.21 | length 35.3
  Top Layer w0.5: v1(-5.842,-35.93) 6.742,-35.93 11.672,-31 11.672,-25.515 10.033,-23.876 7.634,-23.876 7.352,-23.594 7.352,-22.258 J1.2
  Bottom Layer w0.25: U1.21 -6.203,-35.42 -5.842,-35.781 v1(-5.842,-35.93)
SDA: J1.1 U1.22 | length 37.5
  Top Layer w0.5: v1(-6.996,-35.93) -6.939,-35.873 -6.939,-35.514 -6.388,-34.963 6.566,-34.963 10.922,-30.607 10.922,-25.826 9.722,-24.626 5.449,-24.626 4.565,-23.742 J1.1
  Bottom Layer w0.25: v1(-6.996,-35.93) -6.996,-35.802 -6.703,-35.509 U1.22
SENSOR_EN: R1.2 R7.2 U1.28 | length 102.2
  Top Layer w0.5: v1(-26.289,-17.145) -29.083,-14.351 -29.083,-11.303 -32.385,-8.001 -32.385,7.62 -31.115,8.89 -31.115,11.43 -28.321,14.224 -28.321,17.543 -16.273,29.591 -10.922,29.591 -7.62,32.893 -5.796,32.893 -5.542,33.147 v1(-5.461,33.147) -5.404,33.09 -5.191,33.09 -5.122,33.02 v1(-0.762,33.02)
  Bottom Layer w0.25: v1(-26.289,-17.145) -26.289,-22.661 -23.383,-25.567 -18.54,-25.567 -14.409,-29.698 U1.28
  Bottom Layer w0.5: R7.2 v1(-5.461,33.147) ; v1(-0.762,33.02) -0.762,32.939 -0.635,32.812 R1.2
SWCLK: H1.3 U1.37 | length 5.6
  Top Layer w0.25: H1.3@-6.054,-20.235 H1.3
  Top Layer w1: H1.3@-6.054,-20.235 -5.973,-20.316 -5.973,-21.586 v1(-5.969,-21.59)
  Bottom Layer w0.25: U1.37 -7.703,-21.927 -7.366,-21.59 v1(-5.969,-21.59)
SWIO: H1.2 U1.34 | length 17.5
  Top Layer w1: v1(-4.064,-21.59) -4.06,-21.586 -4.06,-20.231 H1.2
  Bottom Layer w0.25: U1.34 -11.529,-26.698 -11.811,-26.416 -11.811,-21.336 -11.29,-20.815 -4.879,-20.815 -4.104,-21.59 v1(-4.064,-21.59)
VCC: C17.2 D2.1 H1.1 R20.1 R27.2 U1.9 U1.24 U1.36 U1.48 U3.16 U4.16 U5.2 U5.4 | length 210.6
  Top Layer w0.6: v1@-29.845,-0.943 -29.845,-6.858 -26.416,-10.287 v1(-26.416,-11.684) ; v1(-13.335,-28.829) -13.297,-28.867 -13.297,-30.137 -10.287,-33.147 v1(-9.144,-33.147) ; C17.2 3.578,26.946 4.699,28.067 15.494,28.067 31.115,12.446 31.115,7.874 ; D2.1 28.956,7.874 31.115,7.874 ; v1(35.052,7.62) 34.998,7.62 34.744,7.874 31.115,7.874
  Top Layer w0.8: v1(-18.034,-24.892) -11.176,-24.892 v1(-11.007,-25.061) -10.965,-25.019 -1.27,-25.019 ; H1.1 -2.032,-22.479 v1(-1.27,-23.241) -1.27,-25.019 ; v1(9.779,-27.686) 9.779,-26.162 9.271,-25.654 3.048,-25.654 2.413,-25.019 -1.27,-25.019 ; v1(28.575,-11.684) 30.099,-10.16 R27.2
  Top Layer w1: D2.1 28.575,1.782 28.974,1.383 28.974,0.833 29.549,0.258 U5.4 U5.2 R27.2
  Bottom Layer w0.25: v1(-11.007,-25.061) -10.902,-25.166 -10.902,-25.547 -10.753,-25.696 U1.36 ; v1(-9.144,-33.147) -9.144,-34.144 -8.998,-34.29 -7.849,-34.29 -7.703,-34.144 U1.24 ; U1.48 -2.203,-23.623 -1.844,-23.264 -1.293,-23.264 v1(-1.27,-23.241) ; U1.9 1.671,-29.698 2.159,-29.21 6.966,-29.21 7.112,-29.064 R20.1
  Bottom Layer w0.6: U4.16 -35.306,-1.905 -34.29,-0.889 v1(-29.845,-0.889) ; v1(-26.416,-11.684) -26.416,-15.24 -25.273,-16.383 -25.273,-22.606 -22.987,-24.892 v1@-18.024,-24.892 ; v1@-17.996,-24.93 -14.135,-28.791 -13.373,-28.791 v1(-13.335,-28.829) ; U3.16 v1(35.052,7.62)
  Bottom Layer w0.8: R20.1 9.737,-27.644 v1(9.779,-27.686) 16.002,-27.686 28.575,-15.113 v1(28.575,-11.684)
pads on no net: ?. ?.1 U1.1 U1.3 U1.4 U1.12 U1.13 U1.14 U1.15 U1.16 U1.17 U1.18 U1.19 U1.20 U1.29 U1.30 U1.31 U1.32 U1.33 U1.38 U1.39 U1.40 U1.41 U1.42 U1.43 U1.45 U1.46

## Polygon pours and split planes (outlines as drawn)
GND on Bottom Layer "GND_L02_P001" (solid, pour order 1): -42.5,0 ccw(c0,0) 0,-42.5 ccw(c0,0) 42.5,0 ccw(c0,0) 0,42.5 ccw(c0,0)
GND on Top Layer "GND_L01_P000" (solid, pour order 0): -42.5,0 ccw(c0,0) 0,-42.5 ccw(c0,0) 42.5,0 ccw(c0,0) 0,42.5 ccw(c0,0)

## Keep-outs
Keep-Out Layer:
  circle w0.3: c0,0 r42.5
  lines w0.3: -25,-15 -25,15 -17.766,15 -15,17.766 15,17.766 17.766,15 25,15 25,-15 17.893,-15 15,-17.893 -15,-17.893 -17.893,-15 -25,-15

## Silkscreen, mask and mechanical layers (free items; w line width, h text height)
Top Solder:
  circle w0.3: c0,0 r42.5
Bottom Solder:
  circle w0.3: c0,0 r42.5
Mechanical 1:
  circle w0.3: c0,0 r42.5
  lines w0.3: -25,-15 -25,15 -17.766,15 -15,17.766 15,17.766 17.766,15 25,15 25,-15 17.893,-15 15,-17.893 -15,-17.893 -17.893,-15 -25,-15

## Text inside footprints (layer, text, board x,y; h text height)
H1: Top Overlay "3V3" at -2.109,-22.021 h0.3 r270; Top Overlay "SWDIO" at -4.141,-22.021 h0.3 r270; Top Overlay "SWCLK" at -6.11,-22.012 h0.3 r270; Top Overlay "GND" at -8.077,-22.038 h0.3 r270
S1: Top Overlay "O" at -3.609,41.349 h0.8 r180; Top Overlay "-" at 4.011,41.241 h0.8 r180; Top Overlay "+" at 1.598,41.228 h0.8 r180
S2: Top Overlay "O" at 12.574,39.6 h0.8 r157.5; Top Overlay "-" at 19.572,36.585 h0.8 r157.5; Top Overlay "+" at 17.338,37.496 h0.8 r157.5
S3: Top Overlay "O" at 26.564,32.049 h0.8 r135; Top Overlay "-" at 31.876,26.585 h0.8 r135; Top Overlay "+" at 30.161,28.282 h0.8 r135
S4: Top Overlay "O" at 36.584,19.877 h0.8 r112.5; Top Overlay "-" at 39.4,12.796 h0.8 r112.5; Top Overlay "+" at 38.465,15.02 h0.8 r112.5
S5: Top Overlay "O" at 41.476,3.609 h0.8 r90; Top Overlay "-" at 41.368,-4.011 h0.8 r90; Top Overlay "+" at 41.355,-1.598 h0.8 r90
S6: Top Overlay "O" at 39.219,-13.463 h0.8 r67.5; Top Overlay "-" at 36.204,-20.461 h0.8 r67.5; Top Overlay "+" at 37.115,-18.227 h0.8 r67.5
S7: Top Overlay "O" at 31.287,-27.199 h0.8 r45; Top Overlay "-" at 25.823,-32.511 h0.8 r45; Top Overlay "+" at 27.52,-30.796 h0.8 r45
S8: Top Overlay "O" at 19.496,-36.711 h0.8 r22.5; Top Overlay "-" at 12.415,-39.527 h0.8 r22.5; Top Overlay "+" at 14.639,-38.592 h0.8 r22.5
S9: Top Overlay "O" at 3.736,-41.349 h0.8; Top Overlay "-" at -3.884,-41.241 h0.8; Top Overlay "+" at -1.471,-41.228 h0.8
S10: Top Overlay "O" at -13.463,-39.219 h0.8 r337.5; Top Overlay "-" at -20.461,-36.204 h0.8 r337.5; Top Overlay "+" at -18.227,-37.115 h0.8 r337.5
S11: Top Overlay "O" at -27.138,-31.498 h0.8 r315; Top Overlay "-" at -32.449,-26.033 h0.8 r315; Top Overlay "+" at -30.734,-27.73 h0.8 r315
S12: Top Overlay "O" at -36.711,-19.496 h0.8 r292.5; Top Overlay "-" at -39.527,-12.415 h0.8 r292.5; Top Overlay "+" at -38.592,-14.639 h0.8 r292.5
S13: Top Overlay "O" at -41.349,-3.609 h0.8 r270; Top Overlay "-" at -41.241,4.011 h0.8 r270; Top Overlay "+" at -41.228,1.598 h0.8 r270
S14: Top Overlay "O" at -39.473,12.701 h0.8 r247.5; Top Overlay "-" at -36.458,19.699 h0.8 r247.5; Top Overlay "+" at -37.369,17.465 h0.8 r247.5
S15: Top Overlay "O" at -31.414,27.199 h0.8 r225; Top Overlay "-" at -25.95,32.511 h0.8 r225; Top Overlay "+" at -27.647,30.796 h0.8 r225
S16: Top Overlay "O" at -18.861,36.965 h0.8 r202.5; Top Overlay "-" at -11.78,39.781 h0.8 r202.5; Top Overlay "+" at -14.004,38.846 h0.8 r202.5